# Altium PCB battery board.PcbDoc
Units mil, origin at the board's own origin, x right, y up, seen from the top; angles counter-clockwise.
Board outline 3775.2 x 3550 mil, 2 copper layers (Top Layer, Bottom Layer), stack 64.572 mil thick; 86 components, 62 nets, 378 pads, 66 vias.
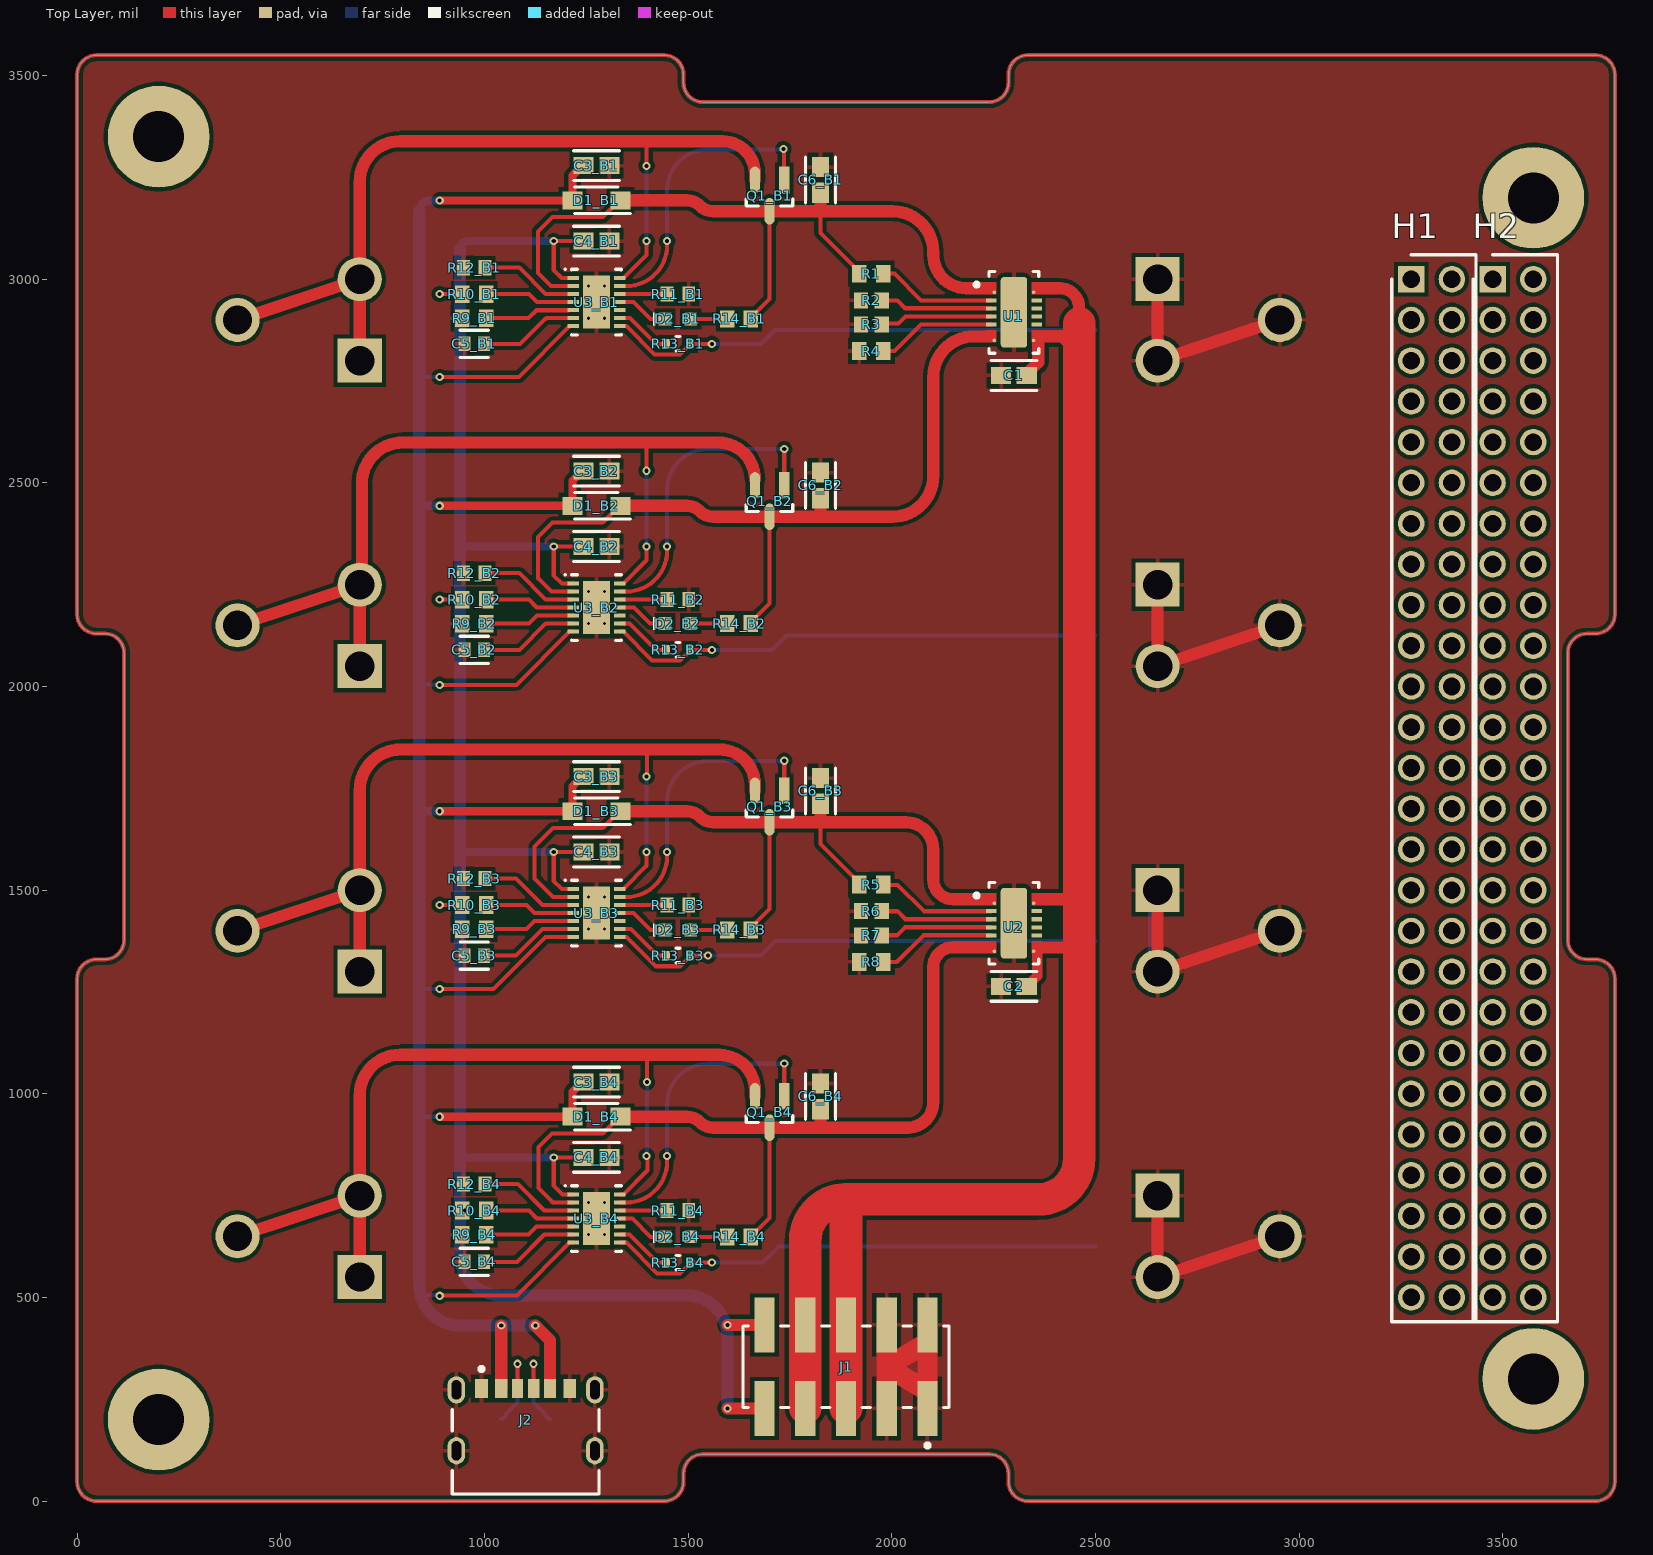
[diagram p0: Top Layer view]
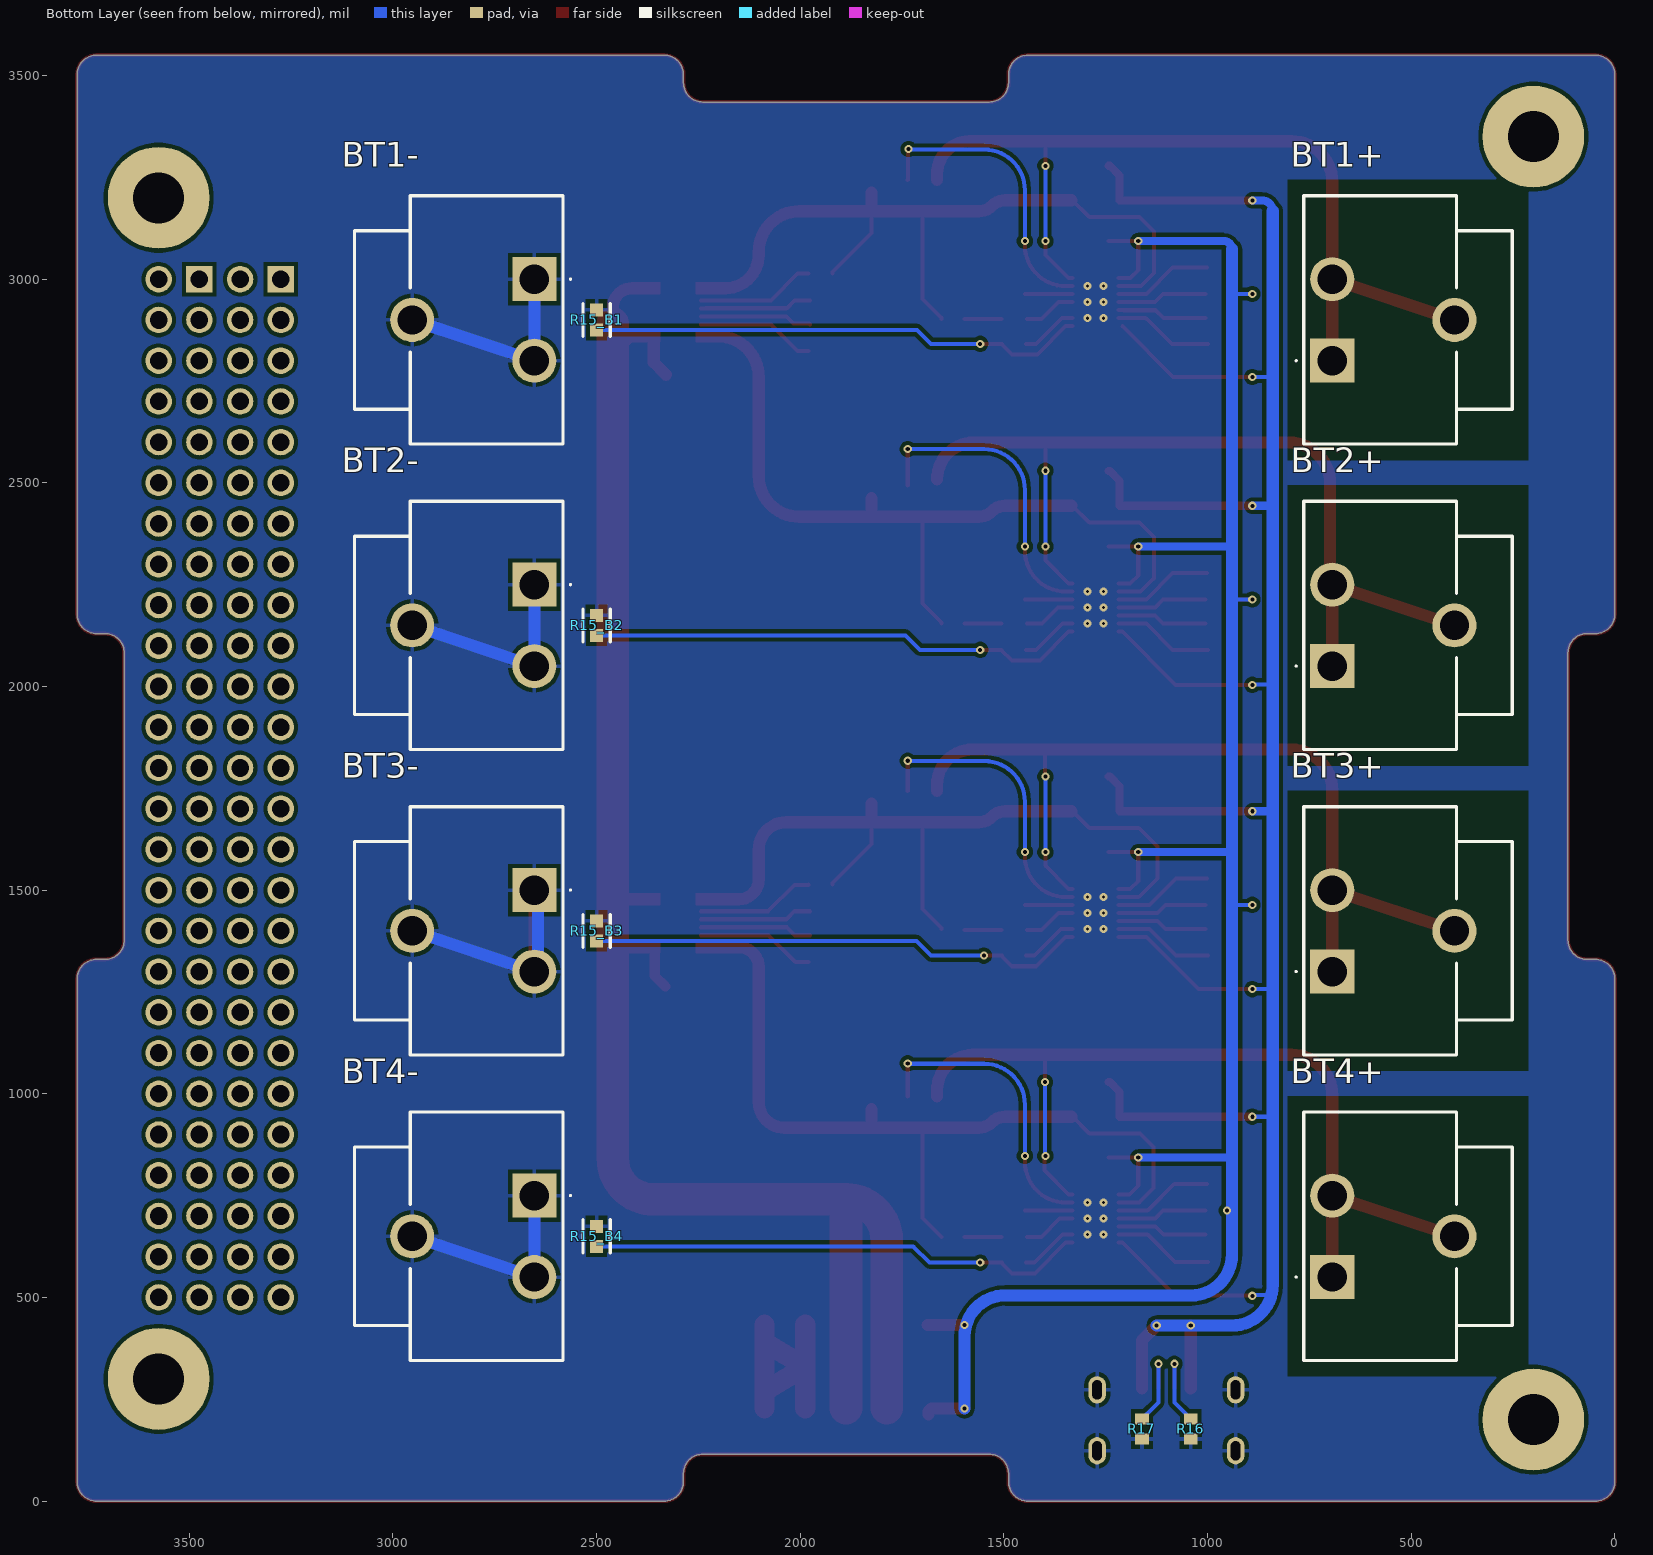
[diagram p1: Bottom Layer view, seen from below]
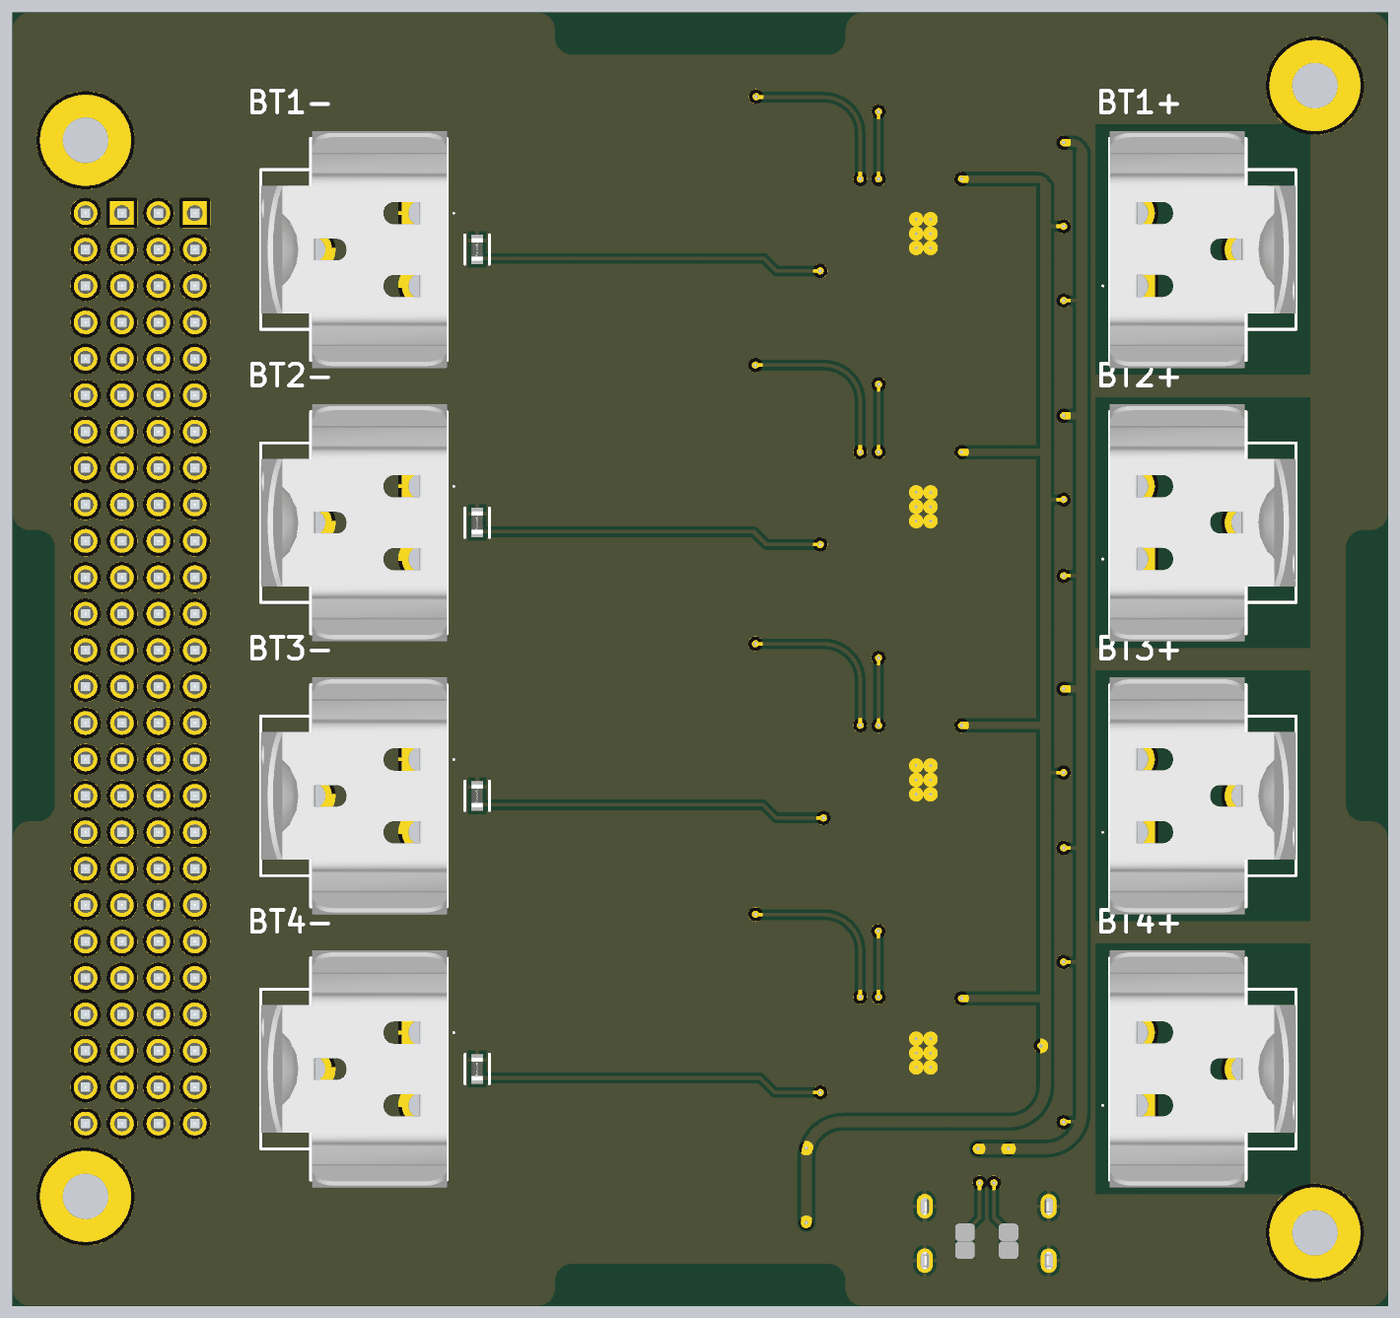
[diagram p2: 3D render of the assembled board from below, using the file's embedded part models]

## Layer stack, top to bottom
Top Solder: solder mask 0.39, Solder Resist, Dk 3.5
Top Layer: signal copper 2.7559
Dielectric1: core 59.06, FR-4, Dk 4.2
Bottom Layer: signal copper 2.7559
Bottom Solder: solder mask 0.39, Solder Resist, Dk 3.5

## Board outline
0,47.24 0,1282.68 cw(c47.24,1282.68) 47.24,1329.92 67.72,1329.92 ccw(c67.72,1377.17) 114.96,1377.17 114.96,2082.68 ccw(c67.72,2082.68) 67.72,2129.92 47.24,2129.92 cw(c47.24,2177.17) 0,2177.17 0,3502.76 cw(c47.24,3502.76) 47.24,3550 1441.34,3550 cw(c1441.34,3502.76) 1488.58,3502.76 1488.58,3482.28 ccw(c1535.83,3482.28) 1535.83,3435.04 2239.37,3435.04 ccw(c2239.37,3482.28) 2286.61,3482.28 2286.61,3502.76 cw(c2333.86,3502.76) 2333.86,3550 3727.95,3550 cw(c3727.95,3502.76) 3775.2,3502.76 3775.2,2177.17 cw(c3727.95,2177.17) 3727.95,2129.92 3707.09,2129.92 ccw(c3707.09,2082.68) 3659.84,2082.68 3659.84,1377.17 ccw(c3707.09,1377.17) 3707.09,1329.92 3727.95,1329.92 cw(c3727.95,1282.68) 3775.2,1282.68 3775.2,47.24 cw(c3727.95,47.24) 3727.95,0 2333.86,0 cw(c2333.86,47.24) 2286.61,47.24 2286.61,67.72 ccw(c2239.37,67.72) 2239.37,114.96 1535.83,114.96 ccw(c1535.83,67.72) 1488.58,67.72 1488.58,47.24 cw(c1441.34,47.24) 1441.34,0 47.24,0 cw(c47.24,47.24)

## Design rules (kind name [scope] priority, off if disabled: settings)
Clearance [All] p1: gap=9.5 ignorepadtopadclearanceinfootprint=FALSE
DiffPairsRouting [All] p1: maxlimit=10 minlimit=10 mostfreqgap=10 toplayer_minwidth=10 toplayer_maxwidth=10 toplayer_prefwidth=10 bottomlayer_minwidth=10 bottomlayer_maxwidth=10 bottomlayer_prefwidth=10 maxuncoupledlength=500
HoleSize [All] p1: absolutevalues=TRUE maxlimit=300 minlimit=10 maxpercent=80.000 minpercent=20.000
MinimumAnnularRing [All] p1: minimumring=10
PasteMaskExpansion [All] p1: expansion=10
PlaneClearance [All] p1: clearance=15
PlaneConnect [All] p1: pad.planeconnectstyle=Relief pad.reliefexpansion=20 pad.reliefentries=4 pad.reliefconductorwidth=10 pad.reliefairgap=10 via.planeconnectstyle=Direct via.reliefexpansion=20 via.reliefentries=4 via.reliefconductorwidth=10 via.reliefairgap=10
PolygonConnect [All] p1: thpad.connectstyle=Relief thpad.reliefconductorwidth=10 thpad.reliefentries=4 thpad.polygonreliefangle="90 Angle" thpad.airgapwidth=10 smdpad.connectstyle=Relief smdpad.reliefconductorwidth=10 smdpad.reliefentries=4 smdpad.polygonreliefangle="90 Angle" smdpad.airgapwidth=10 via.connectstyle=Direct via.reliefconductorwidth=10 via.reliefentries=4 via.polygonreliefangle="90 Angle" via.airgapwidth=10
RoutingVias [All] p1: holewidth=10 width=20 viastyle="Through Hole" minholewidth=10 minwidth=20 maxholewidth=10 maxwidth=20
SMDNeckDown [All] p1: percent=100.000
SilkToSolderMaskClearance SilkscreenOverComponentPads [IsPad] p1: minsilkscreentomaskgap=10 clearancetoexposedcopper=TRUE
SolderMaskExpansion [All] p1: expansion=10 istentingtop=FALSE
SupplyNets "Schematic Supply Nets" [InNet('GND')] p1: voltage=0.000
Width [All] p1: maxlimit=80 minlimit=5 preferedwidth=10
24 further rules are at their usual default settings.

## Classes and differential pairs
component class B4: C3_B4 C4_B4 C5_B4 C6_B4 D1_B4 D2_B4 Q1_B4 R9_B4 R10_B4 R11_B4 R12_B4 R13_B4 R14_B4 R15_B4 U3_B4
component class B3: C3_B3 C4_B3 C5_B3 C6_B3 D1_B3 D2_B3 Q1_B3 R9_B3 R10_B3 R11_B3 R12_B3 R13_B3 R14_B3 R15_B3 U3_B3
component class B2: C3_B2 C4_B2 C5_B2 C6_B2 D1_B2 D2_B2 Q1_B2 R9_B2 R10_B2 R11_B2 R12_B2 R13_B2 R14_B2 R15_B2 U3_B2
component class B1: C3_B1 C4_B1 C5_B1 C6_B1 D1_B1 D2_B1 Q1_B1 R9_B1 R10_B1 R11_B1 R12_B1 R13_B1 R14_B1 R15_B1 U3_B1
channel class BatteryCharger: B1 B2 B3 B4
net class BAT: BAT1 BAT2 BAT3 BAT4
net class BAT_PWR: Vout_BC1 Vout_BC2 Vout_BC3 Vout_BC4
component class U_BMS: C1 C2 R1 R2 R3 R4 R5 R6 R7 R8 U1 U2
component class Top: BT1+ BT1- BT2+ BT2- BT3+ BT3- BT4+ BT4- H1 H2 J1 J2 R16 R17 vd

## Components (designator, comment, footprint, x,y, rotation, side; value= is the part's Value field where it differs from the comment)
BT1+ "54" 54 693.7,2800 r180 bottom locked
BT1- "54" 54 2652.76,3000 r0 bottom locked
BT2+ "54" 54 693.7,2050 r180 bottom locked
BT2- "54" 54 2652.76,2250 r0 bottom locked
BT3+ "54" 54 693.7,1300 r180 bottom locked
BT3- "54" 54 2652.76,1500 r0 bottom locked
BT4+ "54" 54 693.7,550 r180 bottom locked
BT4- "54" 54 2652.76,750 r0 bottom locked
C1 "4.7uF" FP-GRM188-0_15-IPC_A 2300,2763.7 r0 top locked
C2 "4.7uF" FP-GRM188-0_15-IPC_A 2300,1263.7 r0 top locked
C3_B1 "4.7uF" FP-GRM188-0_15-IPC_A 1275,3278.7 r0 top locked (schematic designator C3)
C3_B2 "4.7uF" FP-GRM188-0_15-IPC_A 1275,2528.7 r0 top locked (schematic designator C3)
C3_B3 "4.7uF" FP-GRM188-0_15-IPC_A 1275,1778.7 r0 top locked (schematic designator C3)
C3_B4 "4.7uF" FP-GRM188-0_15-IPC_A 1275,1028.7 r0 top locked (schematic designator C3)
C4_B1 "4.7uF" FP-GRM188-0_15-IPC_A 1275,3093.7 r0 top locked (schematic designator C4)
C4_B2 "4.7uF" FP-GRM188-0_15-IPC_A 1275,2343.7 r0 top locked (schematic designator C4)
C4_B3 "4.7uF" FP-GRM188-0_15-IPC_A 1275,1593.7 r0 top locked (schematic designator C4)
C4_B4 "4.7uF" FP-GRM188-0_15-IPC_A 1275,843.7 r0 top locked (schematic designator C4)
C5_B1 "0.1uF" FP-C0603C-CF-MFG 975,2841.34 r180 top locked value="0.10 μF" (schematic designator C5)
C5_B2 "0.1uF" FP-C0603C-CF-MFG 975,2090.02 r180 top locked value="0.10 μF" (schematic designator C5)
C5_B3 "0.1uF" FP-C0603C-CF-MFG 975,1339.37 r180 top locked value="0.10 μF" (schematic designator C5)
C5_B4 "0.1uF" FP-C0603C-CF-MFG 975,587.4 r180 top locked value="0.10 μF" (schematic designator C5)
C6_B1 "4.7uF" FP-GRM188-0_15-IPC_A 1825,3243.7 r90 top locked (schematic designator C6)
C6_B2 "4.7uF" FP-GRM188-0_15-IPC_A 1825,2493.7 r90 top locked (schematic designator C6)
C6_B3 "4.7uF" FP-GRM188-0_15-IPC_A 1825,1743.7 r90 top locked (schematic designator C6)
C6_B4 "4.7uF" FP-GRM188-0_15-IPC_A 1825,993.7 r90 top locked (schematic designator C6)
D1_B1 "NRVB120VLSFT1G" SODFL3616X98N 1275,3193.7 r180 top locked (schematic designator D1)
D1_B2 "NRVB120VLSFT1G" SODFL3616X98N 1275,2443.7 r180 top locked (schematic designator D1)
D1_B3 "NRVB120VLSFT1G" SODFL3616X98N 1275,1693.7 r180 top locked (schematic designator D1)
D1_B4 "NRVB120VLSFT1G" SODFL3616X98N 1275,943.7 r180 top locked (schematic designator D1)
D2_B1 "" WL-SMCW_0603_150060xx75000 1475,2902.36 r0 top locked (schematic designator D2)
D2_B2 "" WL-SMCW_0603_150060xx75000 1475,2154.33 r0 top locked (schematic designator D2)
D2_B3 "" WL-SMCW_0603_150060xx75000 1475,1402.36 r0 top locked (schematic designator D2)
D2_B4 "" WL-SMCW_0603_150060xx75000 1475,648.78 r0 top locked (schematic designator D2)
H1 "ESQ-126-39-G-D-001" RHDR52W64P254_2X26_6654X495X1135P 3275.2,3000 r270 top locked
H2 "ESQ-126-39-G-D-001" RHDR52W64P254_2X26_6654X495X1135P 3475.2,3000 r270 top locked
J1 "IPS1-105-01-L-D-VS" FP-IPS1-105-01-L-D-VS-MFG 1887.6,330 r0 top locked
J2 "217175-0001" FP-217175-0001-MFG 1101,157 r0 top locked
Q1_B1 "DMP2035U-7" FP-SOT23-IPC_A 1700,3205.25 r270 top locked (schematic designator Q1)
Q1_B2 "DMP2035U-7" FP-SOT23-IPC_A 1700,2455.25 r270 top locked (schematic designator Q1)
Q1_B3 "DMP2035U-7" FP-SOT23-IPC_A 1700,1705.25 r270 top locked (schematic designator Q1)
Q1_B4 "DMP2035U-7" FP-SOT23-IPC_A 1700,955.25 r270 top locked (schematic designator Q1)
R1 "100K" RESC1608X55X30ML20T10 1950,3013.7 r180 top locked
R2 "124" RESC1608X55X30NL20T20 1950,2948.23 r0 top locked
R3 "124" RESC1608X55X30NL20T20 1950,2889.17 r0 top locked
R4 "100K" RESC1608X55X30ML20T10 1950,2823.7 r180 top locked
R5 "100K" RESC1608X55X30ML20T10 1950,1513.7 r180 top locked
R6 "124" RESC1608X55X30NL20T20 1950,1448.23 r0 top locked
R7 "124" RESC1608X55X30NL20T20 1950,1389.17 r0 top locked
R8 "100K" RESC1608X55X30ML20T10 1950,1323.7 r180 top locked
R9_B1 "100K" RESC1608X55X30ML20T10 975,2904.33 r180 top locked (schematic designator R9)
R9_B2 "100K" RESC1608X55X30ML20T10 975,2154.33 r180 top locked (schematic designator R9)
R9_B3 "100K" RESC1608X55X30ML20T10 975,1404.33 r180 top locked (schematic designator R9)
R9_B4 "100K" RESC1608X55X30ML20T10 975,654.33 r180 top locked (schematic designator R9)
R10_B1 "100K" RESC1608X55X30ML20T10 975,2963.39 r180 top locked (schematic designator R10)
R10_B2 "100K" RESC1608X55X30ML20T10 975,2213.39 r180 top locked (schematic designator R10)
R10_B3 "100K" RESC1608X55X30ML20T10 975,1463.39 r180 top locked (schematic designator R10)
R10_B4 "100K" RESC1608X55X30ML20T10 975,713.39 r180 top locked (schematic designator R10)
R11_B1 "71.5K" RESC1608X55X30NL15T15 1475,2963.39 r180 top locked (schematic designator R11)
R11_B2 "71.5K" RESC1608X55X30NL15T15 1475,2213.39 r180 top locked (schematic designator R11)
R11_B3 "71.5K" RESC1608X55X30NL15T15 1475,1463.39 r180 top locked (schematic designator R11)
R11_B4 "71.5K" RESC1608X55X30NL15T15 1475,713.39 r180 top locked (schematic designator R11)
R12_B1 "2.1K" RESC1608X55X30NL15T15 975,3028.35 r0 top locked (schematic designator R12)
R12_B2 "2.1K" RESC1608X55X30NL15T15 975,2278.35 r0 top locked (schematic designator R12)
R12_B3 "2.1K" RESC1608X55X30NL15T15 975,1528.35 r0 top locked (schematic designator R12)
R12_B4 "2.1K" RESC1608X55X30NL15T15 975,778.35 r0 top locked (schematic designator R12)
R13_B1 "10K" FP-RK73B1J-MFG 1475,2841.34 r180 top locked (schematic designator R13)
R13_B2 "10K" FP-RK73B1J-MFG 1475,2090.02 r180 top locked (schematic designator R13)
R13_B3 "10K" FP-RK73B1J-MFG 1475,1339.37 r180 top locked (schematic designator R13)
R13_B4 "10K" FP-RK73B1J-MFG 1475,585.43 r180 top locked (schematic designator R13)
R14_B1 "510 ohm" RESC1608X55X30ML15T15 1625,2902.36 r0 top locked (schematic designator R14)
R14_B2 "510 ohm" RESC1608X55X30ML15T15 1625,2154.33 r0 top locked (schematic designator R14)
R14_B3 "510 ohm" RESC1608X55X30ML15T15 1625,1402.36 r0 top locked (schematic designator R14)
R14_B4 "510 ohm" RESC1608X55X30ML15T15 1625,648.78 r0 top locked (schematic designator R14)
R15_B1 "ERT-J1VG103JA" FP-ERTJ1-IPC_C 2500,2900 r90 bottom locked (schematic designator R15)
R15_B2 "ERT-J1VG103JA" FP-ERTJ1-IPC_C 2500,2150 r90 bottom locked (schematic designator R15)
R15_B3 "ERT-J1VG103JA" FP-ERTJ1-IPC_C 2500,1400 r90 bottom locked (schematic designator R15)
R15_B4 "ERT-J1VG103JA" FP-ERTJ1-IPC_C 2500,650 r90 bottom locked (schematic designator R15)
R16 "5.1K" RESC1608X55X30LL15T15 1041.16,177 r270 bottom locked
R17 "5.1K" RESC1608X55X30LL15T15 1160.84,177 r270 bottom locked
U1 "LTC4415IDHC#TRPBF" FP-DHC-16-05-08-1872-MFG 2300,2918.7 r0 top locked
U2 "LTC4415IDHC#TRPBF" FP-DHC-16-05-08-1872-MFG 2300,1418.7 r0 top locked
U3_B1 "LTC4085EDE-4#PBF" LT-DE-14_V 1275,2943.7 r0 top locked (schematic designator U3)
U3_B2 "LTC4085EDE-4#PBF" LT-DE-14_V 1275,2193.7 r0 top locked (schematic designator U3)
U3_B3 "LTC4085EDE-4#PBF" LT-DE-14_V 1275,1443.7 r0 top locked (schematic designator U3)
U3_B4 "LTC4085EDE-4#PBF" LT-DE-14_V 1275,693.7 r0 top locked (schematic designator U3)

## Footprints (in the part's own frame and the unit in brackets; to place one, negate y for a bottom-side part, rotate by r counter-clockwise, add the part's x,y. Pads: shape width x height; smd on the part's side, far side on the other; paste and mask are expansions set on the pad)
54 [mm]
  rect 2.745x2.745 hole 1.83: 1(0,0)
  round 2.745 hole 1.83: 2(0,5.08) 3(7.62,2.54)
  silkscreen extent -2.3,-5.21 11.22,10.29, body extent -1.77,-5.77 11.22,10.85, height 16.66
FP-217175-0001-MFG [mm]
  rrect100% 1.1x1.7 hole 1.2 slot 0.6 at 0 deg paste-2539.97 mask+0: 1(-4.32,2.95) 2(4.32,2.95) 3(-4.32,-0.85) 4(4.32,-0.85)
  rect 0.7x1.2 smd paste+0 mask+0: A5(-0.5,3.03) B5(0.5,3.03)
  rect 0.76x1.2 smd paste+0 mask+0: A9(1.52,3.03) B9(-1.52,3.03)
  rect 0.8x1.2 smd paste+0 mask+0: A12(2.75,3.03) B12(-2.75,3.03)
  silkscreen extent -4.57,-3.55 4.57,4.37, body extent -4.47,-3.45 4.47,3.45, height 3.46
FP-C0603C-CF-MFG [mm]
  rect 0.75x0.9 smd paste+0 mask+0: 1(-0.6,0) 2(0.6,0)
  silkscreen extent -0.87,-0.85 0.88,0.85, body extent -0.8,-0.4 0.8,0.4, height 0.87
FP-DHC-16-05-08-1872-MFG [mm]
  round 0.219 smd paste+0 mask+0: 1-2(-1.222,1.247) 7-8(-1.222,-1.753) 9-10(1.222,-1.753) 15-16(1.222,1.247)
  rect 0.65x0.25 smd paste+0 mask+0: 3(-1.425,0.75) 4(-1.425,0.25) 5(-1.425,-0.25) 6(-1.425,-0.75) 11(1.425,-0.75) 12(1.425,-0.25) 13(1.425,0.25) 14(1.425,0.75)
  rrect24% 1.65x4.4 smd paste+0 mask+0: 17(0,0)
  Top Layer region: -1.75,1.875 -1.1,1.875 -1.1,1.125 -1.75,1.125 -1.75,1.375 -1.29,1.375 -1.29,1.625 -1.75,1.625 -1.75,1.875
  Top Layer region: -1.75,-1.875 -1.1,-1.875 -1.1,-1.125 -1.75,-1.125 -1.75,-1.375 -1.29,-1.375 -1.29,-1.625 -1.75,-1.625 -1.75,-1.875
  Top Layer region: 1.75,-1.875 1.1,-1.875 1.1,-1.125 1.75,-1.125 1.75,-1.375 1.29,-1.375 1.29,-1.625 1.75,-1.625 1.75,-1.875
  Top Layer region: 1.75,1.875 1.1,1.875 1.1,1.125 1.75,1.125 1.75,1.375 1.29,1.375 1.29,1.625 1.75,1.625 1.75,1.875
  silkscreen extent -2.45,-2.55 1.55,2.55, body extent -1.51,-2.5 1.51,2.5, height 0.85
FP-ERTJ1-IPC_C [mil]
  rect 31.73x31.97 smd paste+0 mask+0: 1(-24.65,0) 2(24.65,0)
  silkscreen extent -41,-33 41,33, body extent -31,-16 31,16, height 36
FP-GRM188-0_15-IPC_A [mil]
  rect 49.46x41.66 smd paste+0 mask+0: 1(-31.53,0) 2(31.53,0)
  silkscreen extent -56,-37 56,37
FP-IPS1-105-01-L-D-VS-MFG [mm]
  rect 1.27x3.43 smd paste+0 mask+0: 1(5.08,-2.605) 2(5.08,2.605) 3(2.54,-2.605) 4(2.54,2.605) 5(0,-2.605) 6(0,2.605) 7(-2.54,-2.605) 8(-2.54,2.605) 9(-5.08,-2.605) 10(-5.08,2.605)
  silkscreen extent -6.42,-5.04 6.42,2.54, body extent -6.54,-3.89 6.54,3.89, height 10.16
FP-RK73B1J-MFG [mm]
  rect 0.5x0.6 smd paste+0 mask+0: 1(-0.75,0) 2(0.75,0)
  silkscreen extent -0.13,-0.45 0.13,0.45, body extent -0.8,-0.4 0.8,0.4, height 0.55
FP-SOT23-IPC_A [mm]
  rect 1.659x0.627 smd paste+0 mask+0: 1(-0.977,0.915)
  rrect100% 1.659x0.627 smd paste+0 mask+0: 2(-0.977,-0.915) 3(0.977,0)
  silkscreen extent 0.23,-1.45 0.65,1.45, body extent -1.2,-1.45 1.2,1.45, height 1.1
LT-DE-14_V [mm] "SON, 14-Leads, Body 4x3mm, Pitch 0.5mm, Thermal Pad 3.3x1.7mm"
  rect 0.7x0.25 smd: 1(-1.45,1.5) 2(-1.45,1) 3(-1.45,0.5) 4(-1.45,0) 5(-1.45,-0.5) 6(-1.45,-1) 7(-1.45,-1.5) 8(1.45,-1.5) 9(1.45,-1) 10(1.45,-0.5) 11(1.45,0) 12(1.45,0.5) 13(1.45,1) 14(1.45,1.5)
  rect 1.7x3.3 smd: 15(0,0)
  silkscreen extent -2,-2.05 1.55,2.1, body extent -1.5,-2 1.5,2, height 0.8
RESC1608X55X30LL15T15 [mm] "Chip Resistor, 2-Leads, Body 1.60x0.80mm, IPC High Density"
  rect 0.7x0.85 smd: 1(-0.625,0) 2(0.625,0)
  body extent -0.87,-0.48 0.87,0.48, height 0.55
RESC1608X55X30ML15T15 [mm] "Chip Resistor, 2-Leads, Body 1.60x0.80mm, IPC Low Density"
  rect 0.9x1.05 smd: 1(-0.725,0) 2(0.725,0)
  body extent -0.87,-0.48 0.87,0.48, height 0.55
RESC1608X55X30ML20T10 [mm] "Chip Resistor, 2-Leads, Body 1.60x0.80mm, IPC Low Density"
  rect 0.9x1.1 smd: 1(-0.75,0) 2(0.75,0)
  body extent -0.9,-0.5 0.9,0.5, height 0.55
RESC1608X55X30NL15T15 [mm] "Chip Resistor, 2-Leads, Body 1.60x0.80mm, IPC Medium Density"
  rect 0.8x0.95 smd: 1(-0.675,0) 2(0.675,0)
  body extent -0.87,-0.48 0.87,0.48, height 0.55
RESC1608X55X30NL20T20 [mm] "Chip Resistor, 2-Leads, Body 1.60x0.80mm, IPC Medium Density"
  rect 0.9x1 smd: 1(-0.65,0) 2(0.65,0)
  body extent -0.9,-0.5 0.9,0.5, height 0.55
RHDR52W64P254_2X26_6654X495X1135P [mm]
  rect 1.65x1.65 hole 1.1: 1(0,0)
  round 1.65 hole 1.1: 2(0,2.54) 3(2.54,0) 4(2.54,2.54) 5(5.08,0) 6(5.08,2.54) 7(7.62,0) 8(7.62,2.54) 9(10.16,0) 10(10.16,2.54) 11(12.7,0) 12(12.7,2.54) 13(15.24,0) 14(15.24,2.54) 15(17.78,0) 16(17.78,2.54) 17(20.32,0) 18(20.32,2.54) 19(22.86,0) 20(22.86,2.54) 21(25.4,0) 22(25.4,2.54) 23(27.94,0) 24(27.94,2.54) 25(30.48,0) 26(30.48,2.54) 27(33.02,0) 28(33.02,2.54) 29(35.56,0) 30(35.56,2.54) 31(38.1,0) 32(38.1,2.54) 33(40.64,0) 34(40.64,2.54) 35(43.18,0) 36(43.18,2.54) 37(45.72,0) 38(45.72,2.54) 39(48.26,0) 40(48.26,2.54) 41(50.8,0) 42(50.8,2.54) 43(53.34,0) 44(53.34,2.54) 45(55.88,0) 46(55.88,2.54) 47(58.42,0) 48(58.42,2.54) 49(60.96,0) 50(60.96,2.54) 51(63.5,0) 52(63.5,2.54)
  silkscreen extent -1.52,-1.2 65.02,4.05, body extent -1.52,-1.2 65.02,3.74, height 11.35
SODFL3616X98N [mm]
  rect 1.24x1.12 smd: 1(-1.5,0) 2(1.5,0)
  silkscreen extent -2.12,-0.82 1.35,0.82, body extent -1.8,-0.82 1.8,0.82, height 0.98
WL-SMCW_0603_150060xx75000 [mm] "SMD Mono-color Chip LED, body 1.60 x 0.80 mm"
  rect 0.8x0.8 smd: 1(-0.8,0) 2(0.8,0)
  silkscreen extent -1.55,-0.4 -1.4,0.4, body extent -0.8,-0.4 0.8,0.4, height 0.7

## Part data
BT1+ BT1- BT2+ BT2- BT3+ BT3- BT4+ BT4-: library part CMP-00029-00001-1, "Battery", Manufacturer_Name="Keystone Electronics", Mouser Part Number=534-54, Arrow Part Number=54, Arrow Price/Stock=https://www.arrow.com/en/products/54/keystone-electronics?utm_currency=USD&region=europe, Datasheet Link=http://www.keyelco.com/product-pdf.cfm?p=826, Design Item ID=54, Height=16.97mm, Manufacturer_Part_Number=54, Mouser Price/Stock=https://www.mouser.co.uk/ProductDetail/Keystone-Electronics/54?qs=73q%2FgRcW4F3NakoJDesViw%3D%3D, Source=SamacSys.SchLib
C1 C2 C3_B1 C3_B2 C3_B3 C3_B4 C4_B1 C4_B2 C4_B3 C4_B4 C6_B1 C6_B2 C6_B3 C6_B4: library part CMP-06035-000034-2, "CAP CER 4.7UF 10V X7S 0603", Case Code (Imperial)=0603, Case Code (Metric)=1608, Dielectric=X7S, Max Operating Temperature=125°C, Min Operating Temperature=-55°C, Package Quantity=4000, Resistor Type=Ceramic, Tolerance=10%, Voltage Rating=10V, Capacitance=4.7uF, Case/Package=0603, Height=0.8mm, Length=1.6mm, Material=Ceramic, Mount="Surface Mount", Packaging="Tape and Reel", Termination=SMD/SMT, Thickness=0.037inch, Voltage Rating (DC)=10V, Weight=0.000222oz, Width=0.8mm
C5_B1 C5_B2 C5_B3 C5_B4: library part CMP-2006-03061-2, "CAP CER 0.1UF 50V X7R 0603", Capacitance="0.10 μF", Manufacturer=KEMET, Manufacturer Part Number=C0603C104K5RACTU, Package=C0603C-CF, Temperature="-55°C to +125°C", Temperature Characteristic=X7R, Temperature Coefficient=30ppm/°C, Temperature Range High=+125°C, Temperature Range Low=-55°C, Tolerance=0.1, Voltage Rating="50 V", Automotive=Yes, Automotive Grade="Grade 1", Category=Cap, ComponentLink2Description=Datasheet, ComponentLink2URL=https://api.kemet.com/component-edge/download/datasheet/C0603C100J5GACAUTO.pdf, Device Class L1="Passive Components", Device Class L2=Capacitors, Device Class L3="Ceramic Capacitors", Digikey Description="CAP CER 0.1UF 50V X7R 0603", Height=0.87mm, Lead Free=Yes, Material=Ceramic, Octopart=https://octopart.com/c0603c104k5ractu-kemet-139244, RoHS=TRUE
D1_B1 D1_B2 D1_B3 D1_B4: "Schottky Diode", Manufacturer_Name=onsemi, Mouser Part Number=863-NRVB120VLSFT1G, Arrow Part Number=NRVB120VLSFT1G, Arrow Price/Stock=null?utm_currency=USD&region=nac, Datasheet Link=https://www.onsemi.com/pub/Collateral/MBR120VLSFT1-D.PDF, Height=0.98mm, Manufacturer_Part_Number=NRVB120VLSFT1G, Mouser Price/Stock=https://www.mouser.co.uk/ProductDetail/onsemi/NRVB120VLSFT1G?qs=tCMd4XlZ%2FiDc2vkUzw3hig%3D%3D
D2_B1 D2_B2 D2_B3 D2_B4: library part CMP-1426-00001-4, "LED Low-Power Uni-Color Red 630nm 2V 2-Pin Chip 0603(1608Metric) T/R", Case Code (Imperial)=0603, Case Code (Metric)=1608, Color=Red, Forward Current=100mA, Forward Voltage=2V, Max Junction Temperature (Tj)=95°C, Max Operating Temperature=85°C, Max Reverse Voltage (DC)=5V, Min Operating Temperature=-40°C, Power Dissipation=72mW, Test Current=20mA, Case/Package=0603, Dominant Wavelength=625nm, Height=700µm, Length=1.6mm, Lens Style="Clear, Rectangular", Luminous Intensity=250mcd, Mount="Surface Mount", Packaging="Tape and Reel", Peak Wavelength=630nm, REACH SVHC=Unknown, Reverse Voltage=5V, RoHS=Compliant, Viewing Angle=140°, Wavelength=625nm, Width=800µm
H1 H2: library part CMP-002-00086-1, "PC / 104 Connectors Elevated Socket Strip", Manufacturer_Name=SAMTEC, Mouser Part Number=200-ESQ12639GD001, Arrow Part Number=ESQ-126-39-G-D-001, Arrow Price/Stock=https://www.arrow.com/en/products/esq-126-39-g-d-001/samtec?region=nac, Datasheet Link=http://suddendocs.samtec.com/catalog_english/esq_th.pdf, Design Item ID=ESQ-126-39-G-D-001, Height=11.35mm, Manufacturer_Part_Number=ESQ-126-39-G-D-001, Mouser Price/Stock=https://www.mouser.co.uk/ProductDetail/Samtec/ESQ-126-39-G-D-001?qs=PB6%2FjmICvI2K%2FCIgL4SVbg%3D%3D, Source=SamacSys.SchLib
J1: library part CMP-02766-000002-1, "CONN RCPT 10POS 0.1 GOLD SMD", Manufacturer=Samtec, Package=0, Temperature="-55°C to +125°C", Temperature Range High=+125°C, Temperature Range Low=-55°C, Voltage Rating=1095V, Automotive=No, Category=Conn, ComponentLink2Description=Datasheet, ComponentLink2URL=http://suddendocs.samtec.com/prints/ips1-1xx-xx-xx-d-vs-xx-xx-mkt.pdf, Conn Gender=Female, Conn Orientation=Vertical, Contact Material=Gold,Nickel, Device Class L1=Connectors, Device Class L2="Headers and Wire Housings", Device Class L3=unset, Digikey Description="CONN RCPT 10POS 0.1 GOLD SMD", Footprint Url=http://suddendocs.samtec.com/prints/ips1-vs.pdf, Height=8.64mm, Is Female=yes, Lead Free=Yes, Manufacturer Part Number=IPS1-105-01-L-D-VS, Number of Contacts=10, Number of Rows=2, Octopart=https://octopart.com/ips1-105-01-l-d-vs-samtec-19544880, Pitch=2.54mm, RoHS=TRUE, Standoff Height=1.02mm
J2: library part CMP-04767-000026-1, "CONN RCP USB2.0 C 6+18P SMD RA"
Q1_B1 Q1_B2 Q1_B3 Q1_B4: library part CMP-2000-06174-3, "MOSFET P-CH 20V 3.6A SOT-23", Case/Package=SOT-23-3, Continuous Drain Current (ID)=3.6A, Drain To Source Breakdown Voltage=-20V, Drain To Source Resistance=23mR, Drain to Source Voltage (Vdss)=20V, Gate to Source Voltage (Vgs)=8V, Input Capacitance=1.61nF, Max Operating Temperature=150°C, Max Power Dissipation=810mW, Min Operating Temperature=-55°C, On-State Resistance=62mR, Package Quantity=3000, Contact Plating=Tin, Element Configuration=Single, Fall Time=42.4ns, Height=1.1mm, Lead Free="Lead Free", Length=3mm, Mount="Surface Mount", Number of Channels=1, Number of Elements=1, Number of Pins=3, Packaging="Tape and Reel", Power Dissipation=810mW, Radiation Hardening=No, Rds On Max=35mR, REACH SVHC="No SVHC", Rise Time=12.4ns, Turn-Off Delay Time=94.1ns, Turn-On Delay Time=16.8ns, Weight=0.000282oz, Width=1.4mm
R1 R4 R5 R8 R9_B1 R9_B2 R9_B3 R9_B4 R10_B1 R10_B2 R10_B3 R10_B4: library part CMP-2000-01852-1, Manufacturer="KOA Speer", Part Number=RK73B1JTTD104J
R2 R3 R6 R7: library part CMP-2000-00899-1, Manufacturer=Panasonic, Part Number=ERA3AEB1240V
R11_B1 R11_B2 R11_B3 R11_B4: library part CMP-2000-00629-1, Manufacturer=Panasonic, Part Number=ERJ-3EKF7152V
R12_B1 R12_B2 R12_B3 R12_B4: library part CMP-2000-00327-1, Manufacturer=Panasonic, Part Number=ERJ-3EKF2101V
R13_B1 R13_B2 R13_B3 R13_B4: library part CMP-2000-01851-2, "RES 10K OHM 5% 1/10W 0603", Case Code (Imperial)=0603, Case Code (Metric)=1608, Max Operating Temperature=155°C, Min Operating Temperature=-55°C, Package Quantity=5000, Power Rating=100mW, Resistance=10kR, Resistance Tolerance=5%, Resistor Type="Thick Film", Temperature Coefficient=200ppm/°C, Voltage Rating=50V, Case/Package=0603, Construction=Rectangular, Depth=0.8mm, Height=0.45mm, Lead Free="Lead Free", Length=1.6mm, Military Standard=Not, Number of Pins=2, Packaging="Tape and Reel", RoHS Compliant=Yes, Series=RK73B, Technology="THICK FILM", Termination=SMD/SMT, Tolerance=5%, Voltage Rating (DC)=50V, Width=0.8mm
R14_B1 R14_B2 R14_B3 R14_B4: library part CMP-2000-00802-1, Manufacturer=Panasonic, Part Number=ERJ-3GEYJ511V
R15_B1 R15_B2 R15_B3 R15_B4: library part CMP-05419-000002-1, "THERMISTOR NTC 10KOHM 3380K 0603", Case Code (Imperial)=0603, Case Code (Metric)=1608, Max Operating Temperature=125°C, Max Power Dissipation=100mW, Min Operating Temperature=-40°C, Package Quantity=4000, Resistance=10kR, Resistance Tolerance=5%, Accuracy=1%, Case/Package=0603, Depth=0.8mm, Lead Free="Lead Free", Length=1.6mm, Mount="Surface Mount", Number of Pins=2, Packaging="Tape and Reel", Radiation Hardening=No, REACH SVHC="No SVHC", RoHS Compliant=Yes, Series=ERT-J, Termination=SMD/SMT, Tolerance=5%, Width=800um
R16 R17: library part CMP-2000-00803-1, Manufacturer=Panasonic, Part Number=ERJ-3GEYJ512V
U1 U2: library part CMP-0479-00071-2, "IC OR CTRLR SRC SELECT 16DFN", Case/Package=DFN, Max Operating Temperature=125°C, Max Output Current=4A, Min Operating Temperature=-40°C, Operating Supply Current=44uA, Package Quantity=2500, Lead Free="Lead Free", Length=5mm, Number of Pins=16, Packaging="Tape and Reel", RoHS Compliant=Yes, Series=PowerPath™
U3_B1 U3_B2 U3_B3 U3_B4: library part CMP-0478-00063-1, "USB Power Manager with Ideal Diode Controller and 3.95 V Li-Ion Charger, 32.6% Vvntc, No Undervoltage Current Limit, 4.35 to 5.5 V Vin, 14-pin SON (DE-14), -40 to 85 degC, Pb-Free", Manufacturer="Linear Technology", Code_JEDEC=MO-229, ComponentLink1Description="Manufacturer URL", ComponentLink1URL=http://www.linear.com/, ComponentLink2Description=Datasheet, ComponentLink2URL=http://cds.linear.com/docs/en/datasheet/408534fb.pdf, ComponentLink3Description="Package Specification", ComponentLink3URL=http://www.linear.com/docs/en/packaging/DFN_14_05-08-1708.pdf, DatasheetVersion="Rev. B", Mounting Technology="Surface Mount", Number Of Cells=1, Number of Outputs=1, PackageDescription="14-Pin Plastic DFN, Body 4 x 3 mm, Pitch 0.5 mm", PackageReference=DE-14, PackageVersion="Rev. B, 06/2010", PartNumber=LTC4085EDE-4#PBF, RoHS=TRUE, Vin Max(V)=5.5, Vin Min(V)=4.35

## Free pads (board coordinates)
  round 250 hole 125.2: 1(200,3350) 2(3575.2,3200) 3(3575.2,300) 4(200,200)

## Via types
v1: diameter 20, hole 10, Top Layer to Bottom Layer, 42 vias
v2: diameter 19.68, hole 7.87, Top Layer to Bottom Layer, 24 vias

## Nets (pads, with @x,y where several pads share a name; then routed paths per layer and width w, separated by ;. In a path a pad name is that pad's centre, name@x,y a point inside that pad or via, vN(x,y) a via of type N, cw(c..) or ccw(c..) an arc to the next point about the centre after c; other vN are vias at no path point)
BAT1: BT1+.1 BT1+.2 BT1+.3 Q1_B1.2 U3_B1.14 | length 2212.1
  Top Layer w10: U3_B1.14 1340.79,3002.76 1398,3059.97 v1(1398,3093.7) ; v1(1398,3278.27) 1398,3339
  Top Layer w30: BT1+.3 BT1+.2 ; BT1+.1 BT1+.2 ; Q1_B1.2 1663.98,3258.69 ccw(c1583.67,3258.69) 1583.67,3339 1398,3339 793.7,3339 ccw(c793.7,3239) 693.7,3239 BT1+.2
  Bottom Layer w10: v1(1398,3093.7) v1(1398,3278.27)
BAT2: BT2+.1 BT2+.2 BT2+.3 Q1_B2.2 U3_B2.14 | length 2219.6
  Top Layer w10: U3_B2.14 1340.79,2252.76 1398,2309.97 v1(1398,2343.7) ; v1(1398,2529.76) 1398,2599
  Top Layer w30: BT2+.3 BT2+.2 ; BT2+.1 BT2+.2 ; Q1_B2.2@1663.98,2508.69 ccw(c1573.67,2508.69) 1573.67,2599 1398,2599 799.04,2599 ccw(c799.04,2499) 699.04,2499 699.04,2255.33 BT2+.2
  Bottom Layer w10: v1(1398,2343.7) v1(1398,2529.76)
BAT3: BT3+.1 BT3+.2 BT3+.3 Q1_B3.2 U3_B3.14 | length 2227.9
  Top Layer w10: U3_B3.14 1340.79,1502.76 1398,1559.97 v1(1398,1593.27) ; v1(1398,1778.7) 1398.5,1779.2 1398.5,1845.08
  Top Layer w30: BT3+.3 BT3+.2 ; BT3+.1 BT3+.2 ; Q1_B3.2 1663.98,1758.69 ccw(c1577.59,1758.69) 1577.59,1845.08 1398.5,1845.08 793.7,1845.08 ccw(c793.7,1745.08) 693.7,1745.08 BT3+.2
  Bottom Layer w10: v1(1398,1593.27) v1(1398,1778.7)
BAT4: BT4+.1 BT4+.2 BT4+.3 Q1_B4.2 U3_B4.14 | length 2229.8
  Top Layer w10: U3_B4.14 1340.79,752.76 1340.87,752.83 1340.87,753.11 1400,812.24 1400,828.7 1399.91,828.79 1399.91,845.53 v1(1398,847.44) ; v1(1399,1028.7) 1399,1095.08
  Top Layer w30: BT4+.3 BT4+.2 ; BT4+.1 BT4+.2 ; 1576.59,1096.08 1400,1096.08 793.7,1096.08 ccw(c793.7,996.08) 693.7,996.08 BT4+.2 ; 1577.59,1095.08 cw(c1577.59,1008.69) 1663.98,1008.69 Q1_B4.2
  Bottom Layer w10: v1(1398,847.44) 1398.5,847.94 1398.5,1028.2 v1(1399,1028.7)
GND: BT1-.1 BT1-.2 BT1-.3 BT2-.1 BT2-.2 BT2-.3 BT3-.1 BT3-.2 BT3-.3 BT4-.1 BT4-.2 BT4-.3 C1.1 C2.1 C3_B1.2 C3_B2.2 C3_B3.2 C3_B4.2 C4_B1.2 C4_B2.2 C4_B3.2 C4_B4.2 C5_B1.2 C5_B2.2 C5_B3.2 C5_B4.2 C6_B1.2 C6_B2.2 C6_B3.2 C6_B4.2 J1.1 J1.2 J1.3 J1.4 J2.1 J2.2 J2.3 J2.4 J2.A12 J2.B12 R2.1 R3.1 R4.2 R6.1 R7.1 R8.2 R9_B1.2 R9_B2.2 R9_B3.2 R9_B4.2 R11_B1.1 R11_B2.1 R11_B3.1 R11_B4.1 R12_B1.1 R12_B2.1 R12_B3.1 R12_B4.1 R15_B1.2 R15_B2.2 R15_B3.2 R15_B4.2 R16.2 R17.2 U1.17 U2.17 U3_B1.15 U3_B2.15 U3_B3.15 U3_B4.15 | length 4823.3
  Top Layer w30: BT4-.1 BT4-.2 BT4-.3 ; BT3-.1 BT3-.2 BT3-.3 ; BT2-.1 BT2-.2 BT2-.3 ; BT1-.1 BT1-.2 BT1-.3
  Top Layer w50: J1.3 1987.6,330 ; J1.4 1987.6,330 ; J1.2 J1.2@2087.6,390.04 ; 1987.6,330 2087.6,269.96 J1.1 J1.2@2087.6,390.04 ; 1987.6,330 J1.2@2087.6,390.04
  Bottom Layer w30: BT4-.1 BT4-.2 BT4-.3 ; BT3-.1 2643.76,1491 2643.76,1309 BT3-.2 BT3-.3 ; BT2-.1 BT2-.2 BT2-.3 ; BT1-.1 BT1-.2 BT1-.3
  other v2: 1255.32,654.33 1294.69,654.33 1255.32,693.7 1294.69,693.7 1255.32,733.07 1294.69,733.07 1255.32,1404.33 1294.69,1404.33 1255.32,1443.7 1294.69,1443.7 1255.32,1483.07 1294.69,1483.07 1255.32,2154.33 1294.69,2154.33 1255.32,2193.7 1294.69,2193.7 1255.32,2233.07 1294.69,2233.07 1255.32,2904.33 1294.69,2904.33 1255.32,2943.7 1294.69,2943.7 1255.32,2983.07 1294.69,2983.07
ID_VOUT: C1.2 C2.2 J1.5 J1.6 J1.7 J1.8 U1.9-10 U1.15-16 U2.9-10 U2.15-16 | length 4429
  Top Layer w25: C2.2 2356.98,1289.15 2356.98,1354.72
  Top Layer w30: C1.2@2329.57,2765.63 2359.84,2795.91 2359.84,2854.72 ; 2360,1359 2460,1359 ; 2360,1477.73 2460,1477.73 ; 2360,2859.7 2418.55,2859.7 2453,2825.25 ; 2360,2977.65 2413.1,2977.65 cw(c2413.1,2930.75) 2460,2930.75 2460,2892.37
  Top Layer w80: J1.7 J1.8 1787.6,640.58 cw(c1887.6,640.58) 1887.6,740.58 ; J1.5 J1.6 1887.6,740.58 ; 2460,1354.72 2460,840.58 cw(c2360,840.58) 2360,740.58 1887.6,740.58 ; 2460,1359 2460,1477.73 2460,2847.09 ; 2460,2854.09 2460,2892.37
NetC5_B1_1: C5_B1.1 U3_B1.6 | length 245.4
  Top Layer w10: C5_B1.1 1087.45,2841.34 1148.48,2902.36 1150.36,2902.36 1152.33,2904.33 U3_B1.6
NetC5_B2_1: C5_B2.1 U3_B2.6 | length 245.9
  Top Layer w10: C5_B2.1 1086.05,2090.02 1150.36,2154.33 U3_B2.6
NetC5_B3_1: C5_B3.1 U3_B3.6 | length 246.2
  Top Layer w10: C5_B3.1 1077.2,1339.37 1142.17,1404.33 U3_B3.6
NetC5_B4_1: C5_B4.1 U3_B4.6 | length 247
  Top Layer w10: C5_B4.1 1079.76,587.4 1146.69,654.33 U3_B4.6
NetD2_B1_1: D2_B1.1 U3_B1.11 | length 128.5
  Top Layer w10: U3_B1.11 1366.1,2943.7 1407.44,2902.36 D2_B1.1
NetD2_B1_2: D2_B1.2 R14_B1.1 | length 90
  Top Layer w10: D2_B1.2 R14_B1.1
NetD2_B2_1: D2_B2.1 U3_B2.11 | length 127.7
  Top Layer w10: U3_B2.11 1367.09,2193.7 1406.46,2154.33 D2_B2.1
NetD2_B2_2: D2_B2.2 R14_B2.1 | length 90
  Top Layer w10: D2_B2.2 R14_B2.1
NetD2_B3_1: D2_B3.1 U3_B3.11 | length 128.5
  Top Layer w10: U3_B3.11 1366.1,1443.7 1407.44,1402.36 D2_B3.1
NetD2_B3_2: D2_B3.2 R14_B3.1 | length 90
  Top Layer w10: D2_B3.2 R14_B3.1
NetD2_B4_1: D2_B4.1 U3_B4.11 | length 130
  Top Layer w10: U3_B4.11 1363,693.7 1407.92,648.78 D2_B4.1
NetD2_B4_2: D2_B4.2 R14_B4.1 | length 90
  Top Layer w10: D2_B4.2 R14_B4.1
NetJ2_A5: J2.A5 R16.1 | length 214.5
  Top Layer w10: J2.A5 v1(1081.32,337)
  Bottom Layer w10: R16.1 1044.11,201.61 1052.89,210.39 1052.89,213.34 1081.32,241.76 v1(1081.32,337)
NetJ2_B5: J2.B5 R17.1 | length 214.5
  Top Layer w10: J2.B5 v1(1120.68,337)
  Bottom Layer w10: v1(1120.68,337) 1120.68,241.76 1149.11,213.34 1149.11,210.39 1157.89,201.61 R17.1
NetQ1_B1_1: Q1_B1.1 U3_B1.13 | length 728.7
  Top Layer w10: U3_B1.13 1348.43,2983.07 ccw(c1348.43,3083.07) 1448.43,3083.07 v1(1448.43,3093.7) ; v1(1734,3319.7) 1735.01,3318.69 1735.01,3244.71 Q1_B1.1
  Bottom Layer w10: v1(1448.43,3093.7) 1448.43,3218.35 cw(c1548.43,3218.35) 1548.43,3318.35 1732.65,3318.35 v1(1734,3319.7)
NetQ1_B2_1: Q1_B2.1 U3_B2.13 | length 756.7
  Top Layer w10: U3_B2.13 1348.43,2233.07 ccw(c1348.43,2333.07) 1448.43,2333.07 v1(1448.43,2343.7) ; Q1_B2.1 v1(1736.02,2582.7)
  Bottom Layer w10: v1(1448.43,2343.7) 1448.43,2482.7 cw(c1548.43,2482.7) 1548.43,2582.7 v1(1736.02,2582.7)
NetQ1_B3_1: Q1_B3.1 U3_B3.13 | length 726.3
  Top Layer w10: U3_B3.13 1348.43,1483.07 ccw(c1348.43,1583.07) 1448.43,1583.07 v1(1448.43,1593.7) ; Q1_B3.1 v1(1736.02,1817.7)
  Bottom Layer w10: v1(1448.43,1593.7) 1448.43,1717 cw(c1548.43,1717) 1548.43,1817 1735.32,1817 v1(1736.02,1817.7)
NetQ1_B4_1: Q1_B4.1 U3_B4.13 | length 740.1
  Top Layer w10: U3_B4.13 1348.43,733.07 ccw(c1348.43,833.07) 1448.43,833.07 v1(1448.43,847.44) ; Q1_B4.1 v1(1736.02,1074.7)
  Bottom Layer w10: v1(1448.43,847.44) 1448.43,973.7 cw(c1548.43,973.7) 1548.43,1073.7 1735.02,1073.7 v1(1736.02,1074.7)
NetR1_1: R1.1 U1.3 | length 291.5
  Top Layer w10: R1.1 2006.5,3013.7 2071.97,2948.23 U1.3
NetR2_2: R2.2 U1.4 | length 276.5
  Top Layer w10: R2.2 2013.49,2948.23 2032.99,2928.73 2232.96,2928.73 2233.06,2928.62 2243.82,2928.62 U1.4
NetR3_2: R3.2 U1.5 | length 276.5
  Top Layer w10: R3.2 1977.56,2891.14 2016.14,2891.14 2033.86,2908.86 U1.5
NetR4_1: R4.1 U1.6 | length 291.5
  Top Layer w10: R4.1 2006.5,2823.7 2071.97,2889.17 U1.6
NetR5_1: R5.1 U2.3 | length 291.5
  Top Layer w10: R5.1 1980.21,1513.02 2014.06,1513.02 2078.86,1448.23 U2.3
NetR6_2: R6.2 U2.4 | length 276.5
  Top Layer w10: R6.2 2013.49,1448.23 2033.17,1428.54 U2.4
NetR7_2: R7.2 U2.5 | length 276.5
  Top Layer w10: R7.2 2012.51,1389.17 2032.2,1408.86 U2.5
NetR8_1: R8.1 U2.6 | length 291.5
  Top Layer w10: R8.1 2012.2,1323.7 2077.68,1389.17 U2.6
NetR9_B1_1: R9_B1.1 U3_B1.5 | length 221.5
  Top Layer w10: R9_B1.1 1107.89,2904.33 1127.39,2923.83 1205.99,2923.83 1206.09,2923.94 1217.83,2923.94 U3_B1.5
NetR9_B2_1: R9_B2.1 U3_B2.5 | length 221.5
  Top Layer w10: R9_B2.1 1109.7,2154.33 1129.2,2173.83 1205.99,2173.83 1206.09,2173.94 1217.83,2173.94 U3_B2.5
NetR9_B3_1: R9_B3.1 U3_B3.5 | length 221.5
  Top Layer w10: R9_B3.1 1103.39,1404.33 1123.07,1424.02 U3_B3.5
NetR9_B4_1: R9_B4.1 U3_B4.5 | length 221.5
  Top Layer w10: R9_B4.1 1108.29,654.33 1127.79,673.83 1205.99,673.83 1206.09,673.94 1217.83,673.94 U3_B4.5
NetR10_B1_1: R10_B1.1 U3_B1.4 | length 221.5
  Top Layer w10: R10_B1.1 1109.7,2963.39 1129.2,2943.89 1205.99,2943.89 1206.09,2943.78 1217.83,2943.78 U3_B1.4
NetR10_B2_1: R10_B2.1 U3_B2.4 | length 221.5
  Top Layer w10: R10_B2.1 1108.78,2213.39 1128.28,2193.89 1205.99,2193.89 1206.09,2193.78 1217.83,2193.78 U3_B2.4
NetR10_B3_1: R10_B3.1 U3_B3.4 | length 221.5
  Top Layer w10: R10_B3.1 1103.39,1463.39 1123.07,1443.7 U3_B3.4
NetR10_B4_1: R10_B4.1 U3_B4.4 | length 221.5
  Top Layer w10: R10_B4.1 1108.78,713.39 1128.28,693.89 1205.99,693.89 1206.09,693.78 1217.83,693.78 U3_B4.4
NetR11_B1_2: R11_B1.2 U3_B1.12 | length 116.3
  Top Layer w10: U3_B1.12 R11_B1.2
NetR11_B2_2: R11_B2.2 U3_B2.12 | length 116.3
  Top Layer w10: U3_B2.12 R11_B2.2
NetR11_B3_2: R11_B3.2 U3_B3.12 | length 116.3
  Top Layer w10: U3_B3.12 R11_B3.2
NetR11_B4_2: R11_B4.2 U3_B4.12 | length 116.3
  Top Layer w10: U3_B4.12 R11_B4.2
NetR12_B1_2: R12_B1.2 U3_B1.3 | length 243.2
  Top Layer w10: R12_B1.2 1085.4,3028.35 1150.36,2963.39 U3_B1.3
NetR12_B2_2: R12_B2.2 U3_B2.3 | length 243.2
  Top Layer w10: R12_B2.2 1085.4,2278.35 1150.36,2213.39 U3_B2.3
NetR12_B3_2: R12_B3.2 U3_B3.3 | length 243.2
  Top Layer w10: R12_B3.2 1077.2,1528.35 1142.17,1463.39 U3_B3.3
NetR12_B4_2: R12_B4.2 U3_B4.3 | length 243.2
  Top Layer w10: R12_B4.2 1081.73,778.35 1146.69,713.39 U3_B4.3
NetR13_B1_1: R13_B1.1 R15_B1.1 U3_B1.8 | length 1222.9
  Top Layer w10: U3_B1.8 1348.29,2884.65 1417.91,2815.03 1480.19,2815.03 1504.53,2839.37 R13_B1.1 v1(1558.07,2841.34)
  Bottom Layer w10: v1(1558.07,2841.34) 1678.97,2841.34 1712.98,2875.35 R15_B1.1
NetR13_B1_2: R13_B1.2 U3_B1.9 | length 139.5
  Top Layer w10: U3_B1.9 1332.17,2904.25 1357.72,2904.25 1420.63,2841.34 R13_B1.2
NetR13_B2_1: R13_B2.1 R15_B2.1 U3_B2.8 | length 1222.8
  Top Layer w10: U3_B2.8 1340.79,2134.65 1411.73,2063.7 1480.19,2063.7 1506.5,2090.02 v1(1558.07,2090.02)
  Bottom Layer w10: v1(1558.07,2090.02) 1705.96,2090.02 1741.3,2125.35 R15_B2.1
NetR13_B2_2: R13_B2.2 U3_B2.9 | length 140
  Top Layer w10: U3_B2.9 1332.17,2154.25 1356.39,2154.25 1420.63,2090.02 R13_B2.2
NetR13_B3_1: R13_B3.1 R15_B3.1 U3_B3.8 | length 1224.5
  Top Layer w10: U3_B3.8 1349.06,1384.65 1420.64,1313.06 1480.19,1313.06 1504.53,1337.4 R13_B3.1 v1(1549,1339.37)
  Bottom Layer w10: v1(1549,1339.37) 1678.67,1339.37 1714.65,1375.35 R15_B3.1
NetR13_B3_2: R13_B3.2 U3_B3.9 | length 140.3
  Top Layer w10: U3_B3.9 1332.17,1404.25 1359.45,1404.25 1424.33,1339.37 R13_B3.2
NetR13_B4_1: R13_B4.1 R15_B4.1 U3_B4.8 | length 1227.8
  Top Layer w10: U3_B4.8 1348.5,634.65 1424.03,559.12 1480.19,559.12 1504.53,583.46 R13_B4.1 v1(1558.07,585.43)
  Bottom Layer w10: v1(1558.07,585.43) 1682.63,585.43 1722.55,625.35 R15_B4.1
NetR13_B4_2: R13_B4.2 U3_B4.9 | length 141.9
  Top Layer w10: U3_B4.9 1332.17,654.25 1356.47,654.25 1425.29,585.43 R13_B4.2
Vin_Sol: C4_B1.1 C4_B2.1 C4_B3.1 C4_B4.1 J1.9 J1.10 R10_B1.2 R10_B2.2 R10_B3.2 R10_B4.2 U3_B1.1 U3_B2.1 U3_B3.1 U3_B4.1 | length 5676.9
  Top Layer w10: v1(890,1463.7) 945.16,1463.7 R10_B3.2 ; v1(890,2213.7) 945.16,2213.7 R10_B2.2 ; v1(890,2963.7) 945.16,2963.7 R10_B1.2 ; R10_B4.2 v1(952.5,713.39) ; U3_B4.1 1191.65,752.76 1170,774.41 v1(1170,843.7) C4_B4.1 ; U3_B3.1 1190.12,1502.76 1170,1522.88 v1(1170,1593.27) 1170.43,1593.7 C4_B3.1 ; U3_B2.1 1190.12,2252.76 1170,2272.88 v1(1170,2343.7) C4_B2.1 ; U3_B1.1 1189.68,3002.76 1170,3022.44 v1(1170,3093.7) C4_B1.1
  Top Layer w30: v1(1596.46,227.44) 1677.6,227.44 1685,220.04 J1.9@1685,212.44 ; v1(1596.46,432.56) J1.10
  Bottom Layer w10: v1(890,1463.7) 890.32,1463.39 940,1463.39 ; v1(890,2213.7) 890.32,2213.39 940,2213.39 ; v1(890,2963.7) 939.68,2963.7 940,2963.39 ; 940,713.39 v1(952.5,713.39) ; 940,2343.27 940.43,2343.7
  Bottom Layer w20: 940,843.7 v1(1170,843.7) ; 940,1593.27 v1(1170,1593.27) ; 940,3074.02 cw(c959.68,3074.02) 959.68,3093.7 v1(1170,3093.7) ; 940.43,2343.7 v1(1170,2343.7)
  Bottom Layer w30: 940,3074.02 940,2963.39 940,2343.27 940,2213.39 940,1593.27 940,1463.39 940,843.7 940,713.39 940,605 ccw(c1040,605) 1040,505 1496.46,505 cw(c1496.46,405) 1596.46,405 v1(1596.46,227.44)
Vout_BC1: C6_B1.1 D1_B1.1 Q1_B1.3 R1.2 R14_B1.2 U1.1-2 U3_B1.2 | length 1977.2
  Top Layer w10: U3_B1.2 1163.28,2983.07 1131.43,3014.92 1131.43,3117.17 1166.62,3152.36 1290.35,3152.36 1331.69,3193.7 D1_B1.1 ; R14_B1.2 1653.54,2905.31 1700,2951.77 Q1_B1.3 ; 1825,3166.79 1825,3113.11 1920.47,3017.64 R1.2
  Top Layer w30: D1_B1.1 1496.75,3193.7 cw(c1496.75,3147.77) 1529.23,3180.25 ccw(c1561.71,3212.73) 1561.71,3166.79 Q1_B1.3 1825,3166.79 ; C6_B1.1 1825,3166.79 ; 2235.21,2977.73 2184,2977.73 cw(c2184,3059.73) 2102,3059.73 2102,3066.79 ccw(c2002,3066.79) 2002,3166.79 1825,3166.79
Vout_BC2: C6_B2.1 D1_B2.1 Q1_B2.3 R14_B2.2 U1.7-8 U3_B2.2 | length 2037.6
  Top Layer w10: U3_B2.2 1164.22,2233.07 1131.43,2265.87 1131.43,2367.17 1166.62,2402.36 1290.35,2402.36 1331.69,2443.7 D1_B2.1 ; R14_B2.2 1653.54,2157.28 1700,2203.74 Q1_B2.3
  Top Layer w30: D1_B2.1 1496.75,2443.7 cw(c1496.75,2397.77) 1529.23,2430.25 ccw(c1561.71,2462.73) 1561.71,2416.79 Q1_B2.3 1825,2416.79 ; C6_B2.1 1825,2416.79 ; 2192.59,2859.67 2235.21,2859.67 ; 2202,2859.67 ccw(c2202,2759.67) 2102,2759.67 2102,2516.79 cw(c2002,2516.79) 2002,2416.79 1825,2416.79
Vout_BC3: C6_B3.1 D1_B3.1 Q1_B3.3 R5.2 R14_B3.2 U2.1-2 U3_B3.2 | length 2006.2
  Top Layer w10: U3_B3.2 1168.74,1483.07 1123.07,1528.74 1123.07,1606.66 1168.78,1652.36 1290.35,1652.36 1331.69,1693.7 D1_B3.1 ; R14_B3.2@1653.54,1404.33 1653.54,1407.28 1700,1453.74 Q1_B3.3 ; 1825,1666.79 1825,1613.11 1920.47,1517.64 R5.2
  Top Layer w30: D1_B3.1 1496.75,1693.7 cw(c1496.75,1647.77) 1529.23,1680.25 ccw(c1561.71,1712.73) 1561.71,1666.79 Q1_B3.3 1825,1666.79 ; C6_B3.1 1825,1666.79 ; 2235.21,1477.73 2149.97,1477.73 cw(c2149.97,1525.7) 2102,1525.7 2102,1599.2 ccw(c2034.41,1599.2) 2034.41,1666.79 1825,1666.79
Vout_BC4: C6_B4.1 D1_B4.1 Q1_B4.3 R14_B4.2 U2.7-8 U3_B4.2 | length 2067.3
  Top Layer w10: U3_B4.2 1167.65,733.07 1132.42,768.3 1132.42,869.12 1165.66,902.36 1290.35,902.36 D1_B4.1@1331.69,943.7 ; R14_B4.2 1700,695.24 Q1_B4.3
  Top Layer w30: D1_B4.1 1496.75,943.7 cw(c1496.75,897.77) 1529.23,930.25 ccw(c1561.71,962.73) 1561.71,916.79 Q1_B4.3 1825,916.79 ; C6_B4.1 1825,916.79 ; 2235.21,1359.67 2149.97,1359.67 ccw(c2149.97,1311.7) 2102,1311.7 2102,979.7 cw(c2039.09,979.7) 2039.09,916.79 1825,916.79
VUSB: C3_B1.1 C3_B2.1 C3_B3.1 C3_B4.1 D1_B1.2 D1_B2.2 D1_B3.2 D1_B4.2 J2.A9 J2.B9 U3_B1.7 U3_B2.7 U3_B3.7 U3_B4.7 | length 6935.3
  Top Layer w10: v1(890,504.02) 890.98,505 1079.57,505 1209.21,634.65 U3_B4.7 ; v1(890,1257) 1022.41,1257 1150.06,1384.65 U3_B3.7 ; v1(890,2004) 1078.57,2004 1209.21,2134.65 U3_B2.7 ; v1(890,2760) 1084.57,2760 U3_B1.7@1209.13,2884.57
  Top Layer w20: v1(890,943.7) D1_B4.2 1215.94,1005.08 1239.57,1028.7 C3_B4.1 ; v1(890,1693.7) D1_B3.2 1215.94,1755.08 1239.57,1778.7 C3_B3.1 ; v1(890,2443.7) D1_B2.2 1215.94,2505.08 1239.57,2528.7 C3_B2.1 ; v1(890,3193.7) D1_B1.2 1215.94,3255.08 1239.57,3278.7 C3_B1.1
  Top Layer w30: J2.B9 v1(1041.16,430.91) ; v1(1124.78,430.91) 1160.84,394.84 J2.A9
  Bottom Layer w10: 840,505.93 888.09,505.93 v1(890,504.02) ; 840,939.82 cw(c843.88,939.82) 843.88,943.7 v1(890,943.7) ; 840,1257 v1(890,1257) ; 840,2005.21 888.79,2005.21 v1(890,2004) ; 840,2760 v1(890,2760)
  Bottom Layer w20: 840,1693.7 v1(890,1693.7) ; 840,2443.7 v1(890,2443.7) ; 840,3167.75 cw(c865.95,3167.75) 865.95,3193.7 v1(890,3193.7)
  Bottom Layer w30: 840,3167.75 840,2760 840,2443.7 840,2005.21 840,1693.7 840,1257 840,939.82 840,530.91 ccw(c940,530.91) 940,430.91 v1(1041.16,430.91) v1(1124.78,430.91)
pads on no net: H1.1 H1.2 H1.3 H1.4 H1.5 H1.6 H1.7 H1.8 H1.9 H1.10 H1.11 H1.12 H1.13 H1.14 H1.15 H1.16 H1.17 H1.18 H1.19 H1.20 H1.21 H1.22 H1.23 H1.24 H1.25 H1.26 H1.27 H1.28 H1.29 H1.30 H1.31 H1.32 H1.33 H1.34 H1.35 H1.36 H1.37 H1.38 H1.39 H1.40 H1.41 H1.42 H1.43 H1.44 H1.45 H1.46 H1.47 H1.48 H1.49 H1.50 H1.51 H1.52 H2.1 H2.2 H2.3 H2.4 H2.5 H2.6 H2.7 H2.8 H2.9 H2.10 H2.11 H2.12 H2.13 H2.14 H2.15 H2.16 H2.17 H2.18 H2.19 H2.20 H2.21 H2.22 H2.23 H2.24 H2.25 H2.26 H2.27 H2.28 H2.29 H2.30 H2.31 H2.32 H2.33 H2.34 H2.35 H2.36 H2.37 H2.38 H2.39 H2.40 H2.41 H2.42 H2.43 H2.44 H2.45 H2.46 H2.47 H2.48 H2.49 H2.50 H2.51 H2.52 U1.11 U1.12 U1.13 U1.14 U2.11 U2.12 U2.13 U2.14 U3_B1.10 U3_B2.10 U3_B3.10 U3_B4.10
copper on no net: | length 15165.3
  Top Layer w10: 0,47.24 ccw(c47.24,47.24) 47.24,0 1441.34,0 ccw(c1441.34,47.24) 1488.58,47.24 1488.58,67.72 cw(c1535.83,67.72) 1535.83,114.96 2239.37,114.96 cw(c2239.37,67.72) 2286.61,67.72 2286.61,47.24 ccw(c2333.86,47.24) 2333.86,0 3727.95,0 ccw(c3727.95,47.24) 3775.2,47.24 3775.2,1282.68 ccw(c3727.95,1282.68) 3727.95,1329.92 3727.56,1329.92 3707.09,1329.92 cw(c3707.09,1377.17) 3659.84,1377.17 3659.84,2082.68 cw(c3707.09,2082.68) 3707.09,2129.92 3707.29,2129.92 3727.95,2129.92 ccw(c3727.95,2177.17) 3775.2,2177.17 3775.2,3502.76 ccw(c3727.95,3502.76) 3727.95,3550 2333.86,3550 ccw(c2333.86,3502.76) 2286.61,3502.76 2286.61,3482.28 cw(c2239.37,3482.28) 2239.37,3435.04 1535.83,3435.04 cw(c1535.83,3482.28) 1488.58,3482.28 1488.58,3502.76 ccw(c1441.34,3502.76) 1441.34,3550 47.24,3550 ccw(c47.24,3502.76) 0,3502.76 0,2177.17 ccw(c47.24,2177.17) 47.24,2129.92 67.72,2129.92 cw(c67.72,2082.68) 114.96,2082.68 114.96,1377.17 cw(c67.72,1377.17) 67.72,1329.92 47.24,1329.92 ccw(c47.24,1282.68) 0,1282.68 0,47.24

## Polygon pours and split planes (outlines as drawn)
GND on Top Layer "GND_L01_P000" (solid, pour order 0): 47.24,0 1441.34,0 ccw(c1441.34,47.24) 1488.58,47.24 1488.58,67.72 cw(c1535.83,67.72) 1535.83,114.96 2239.37,114.96 cw(c2239.37,67.72) 2286.61,67.72 2286.61,47.24 ccw(c2333.86,47.24) 2333.86,0 3727.95,0 ccw(c3727.95,47.24) 3775.2,47.24 3775.2,1282.68 ccw(c3727.95,1282.68) 3727.95,1329.92 3707.09,1329.92 cw(c3707.09,1377.16) 3659.84,1377.16 3659.84,2082.68 cw(c3707.09,2082.68) 3707.09,2129.92 3727.95,2129.92 ccw(c3727.95,2177.17) 3775.2,2177.17 3775.2,3502.76 ccw(c3727.95,3502.76) 3727.95,3550 2333.86,3550 ccw(c2333.86,3502.76) 2286.61,3502.76 2286.61,3482.28 cw(c2239.37,3482.28) 2239.37,3435.04 1535.83,3435.04 cw(c1535.83,3482.28) 1488.58,3482.28 1488.58,3502.76 ccw(c1441.34,3502.76) 1441.34,3550 47.24,3550 ccw(c47.24,3502.76) 0,3502.76 0,2177.16 ccw(c47.24,2177.16) 47.24,2129.92 67.72,2129.92 cw(c67.72,2082.68) 114.96,2082.68 114.96,1377.17 cw(c67.72,1377.17) 67.72,1329.92 47.24,1329.92 ccw(c47.24,1282.68) 0,1282.68 0,47.24 ccw(c47.24,47.24)
GND on Bottom Layer "GND_L02_P005" (solid, pour order 5): 47.24,0 1441.34,0 ccw(c1441.34,47.24) 1488.58,47.24 1488.58,67.72 cw(c1535.83,67.72) 1535.83,114.96 2239.37,114.96 cw(c2239.37,67.72) 2286.61,67.72 2286.61,47.24 ccw(c2333.86,47.24) 2333.86,0 3727.95,0 ccw(c3727.95,47.24) 3775.2,47.24 3775.2,1282.68 ccw(c3727.95,1282.68) 3727.95,1329.92 3707.09,1329.92 cw(c3707.09,1377.16) 3659.84,1377.16 3659.84,2082.68 cw(c3707.09,2082.68) 3707.09,2129.92 3727.95,2129.92 ccw(c3727.95,2177.17) 3775.2,2177.17 3775.2,3502.76 ccw(c3727.95,3502.76) 3727.95,3550 2333.86,3550 ccw(c2333.86,3502.76) 2286.61,3502.76 2286.61,3482.28 cw(c2239.37,3482.28) 2239.37,3435.04 1535.83,3435.04 cw(c1535.83,3482.28) 1488.58,3482.28 1488.58,3502.76 ccw(c1441.34,3502.76) 1441.34,3550 47.24,3550 ccw(c47.24,3502.76) 0,3502.76 0,2177.16 ccw(c47.24,2177.16) 47.24,2129.92 67.72,2129.92 cw(c67.72,2082.68) 114.96,2082.68 114.96,1377.17 cw(c67.72,1377.17) 67.72,1329.92 47.24,1329.92 ccw(c47.24,1282.68) 0,1282.68 0,47.24 ccw(c47.24,47.24)

## Other copper
Bottom Layer:
  pour cut-out: 212.6,3244.29 803.15,3244.29 803.15,2556 212.6,2556
  pour cut-out: 212.6,2494.29 803.15,2494.29 803.15,1806 212.6,1806
  pour cut-out: 212.6,1744.29 803.15,1744.29 803.15,1056 212.6,1056
  pour cut-out: 212.6,994.29 803.15,994.29 803.15,306 212.6,306